# Altium PCB BK5932.PcbDoc (part 2 of 2)
Units mm, origin at the board's own origin, x right, y up, seen from the top; angles counter-clockwise.
Board outline 27.94 x 28.57 mm, 2 copper layers (Top Layer, Bottom Layer); 30 components, 25 nets, 105 pads, 28 vias.
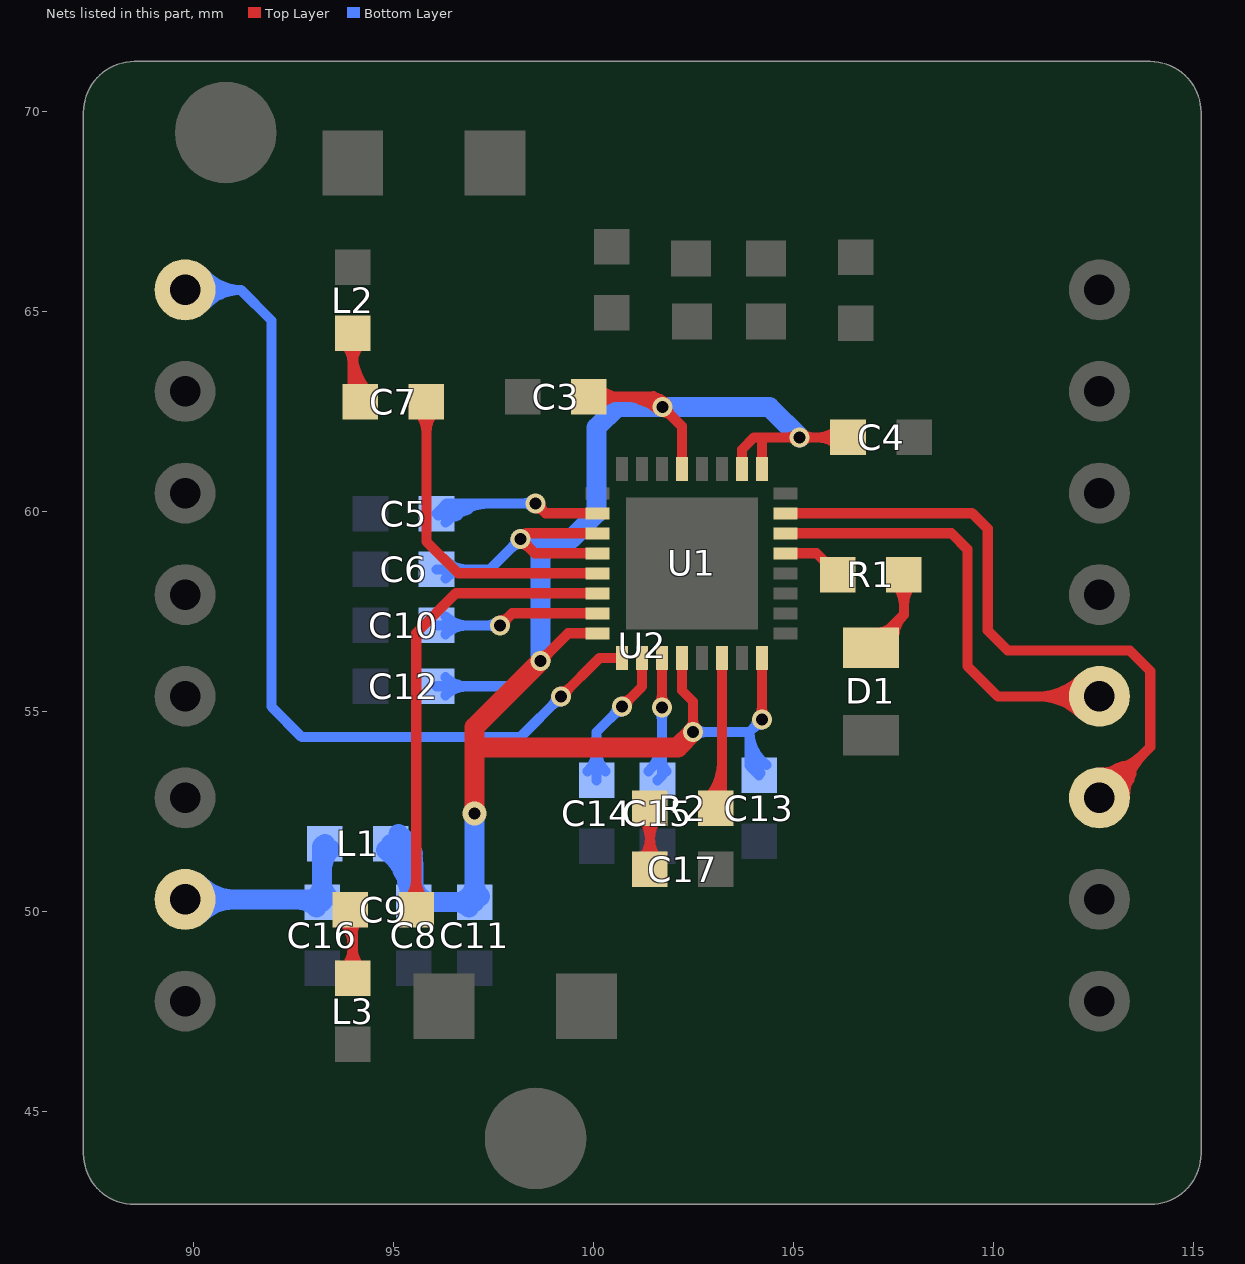
[diagram p2: the nets of this part, all layers, seen from the top]

## Via types
v1: diameter 0.5, hole 0.3, Top Layer to Bottom Layer, 27 vias
v2: diameter 0.6, hole 0.3, Top Layer to Bottom Layer, 1 vias

## Nets (pads, with @x,y where several pads share a name; then routed paths per layer and width w, separated by ;. In a path a pad name is that pad's centre, name@x,y a point inside that pad or via, vN(x,y) a via of type N, cw(c..) or ccw(c..) an arc to the next point about the centre after c; other vN are vias at no path point) (continued)
NetC3_1: C3.1 C4.1 C6.2 C8.2 C11.2 C12.2 C13.2 L1.2 U1.3 U1.4 U1.8 U1.12 U1.16 U1.25 U1.26 U1.29 | length 215.5
  Top Layer w0.254: v1(98.679,56.261) 99.37,56.952 U1.8@100.101,56.952 ; C3.1@99.885,62.865 101.465,62.865 v1(101.727,62.603) 102.203,62.127 ; U1.4@100.101,58.952 98.528,58.952 v1(98.171,59.309) 98.314,59.452 U1.3@100.101,59.452 ; 102.207,62.131 102.211,62.127 U1.29@102.211,61.062 ; U1.12@102.211,56.337 102.211,55.523 102.489,55.245 v1(102.489,54.483) ; U1.26@103.711,61.062 103.711,61.547 104.013,61.849 v1(105.156,61.849) C4.1@106.362,61.849 ; v1(104.211,54.793) U1.16@104.211,56.337 ; U1.25@104.211,61.062 104.211,61.793 ; v1@98.171,59.186 cw(c98.171,58.889) 98.381,59.099 ; v1@98.171,59.186 cw(c98.171,58.889) 98.381,59.099 ; v1@98.171,59.186 cw(c98.171,58.889) 98.381,59.099 ; v1@98.171,59.186 cw(c98.171,58.889) 98.381,59.099 ; v1@98.171,59.186 cw(c98.171,58.889) 98.381,59.099 ; v1@98.171,59.186 cw(c98.171,58.889) 98.381,59.099 ; v1@98.294,59.309 ccw(c98.591,59.309) 98.381,59.099 ; v1@98.294,59.309 ccw(c98.591,59.309) 98.381,59.099 ; v1@98.294,59.309 ccw(c98.591,59.309) 98.381,59.099 ; v1@98.294,59.309 ccw(c98.591,59.309) 98.381,59.099 ; v1@98.294,59.309 ccw(c98.591,59.309) 98.381,59.099 ; v1@98.294,59.309 ccw(c98.591,59.309) 98.381,59.099 ; v1@98.679,56.384 ccw(c98.679,56.681) 98.889,56.471 ; v1@98.679,56.384 ccw(c98.679,56.681) 98.889,56.471 ; v1@98.679,56.384 ccw(c98.679,56.681) 98.889,56.471 ; v1@98.679,56.384 ccw(c98.679,56.681) 98.889,56.471 ; v1@98.679,56.384 ccw(c98.679,56.681) 98.889,56.471 ; v1@98.679,56.384 ccw(c98.679,56.681) 98.889,56.471 ; v1@98.802,56.261 cw(c99.099,56.261) 98.889,56.471 ; v1@98.802,56.261 cw(c99.099,56.261) 98.889,56.471 ; v1@98.802,56.261 cw(c99.099,56.261) 98.889,56.471 ; v1@98.802,56.261 cw(c99.099,56.261) 98.889,56.471 ; v1@98.802,56.261 cw(c99.099,56.261) 98.889,56.471 ; v1@98.802,56.261 cw(c99.099,56.261) 98.889,56.471 ; C3.1@100.11,62.64 cw(c100.652,62.098) 100.652,62.865 ; C3.1@100.11,62.64 cw(c100.652,62.098) 100.652,62.865 ; C3.1@100.11,62.64 cw(c100.652,62.098) 100.652,62.865 ; C3.1@100.11,62.64 cw(c100.652,62.098) 100.652,62.865 ; C3.1@100.11,62.64 cw(c100.652,62.098) 100.652,62.865 ; C3.1@100.11,62.64 cw(c100.652,62.098) 100.652,62.865 ; C3.1@100.11,63.09 ccw(c100.652,63.632) 100.652,62.865 ; C3.1@100.11,63.09 ccw(c100.652,63.632) 100.652,62.865 ; C3.1@100.11,63.09 ccw(c100.652,63.632) 100.652,62.865 ; C3.1@100.11,63.09 ccw(c100.652,63.632) 100.652,62.865 ; C3.1@100.11,63.09 ccw(c100.652,63.632) 100.652,62.865 ; C3.1@100.11,63.09 ccw(c100.652,63.632) 100.652,62.865 ; 100.798,62.865 cw(c100.798,61.674) v1@101.64,62.516 ; 100.798,62.865 cw(c100.798,61.674) v1@101.64,62.516 ; 100.798,62.865 cw(c100.798,61.674) v1@101.64,62.516 ; 100.798,62.865 cw(c100.798,61.674) v1@101.64,62.516 ; 100.798,62.865 cw(c100.798,61.674) v1@101.64,62.516 ; 100.798,62.865 cw(c100.798,61.674) v1@101.64,62.516 ; 101.165,62.79 ccw(c101.512,63.391) v1@101.695,62.722 ; 101.165,62.79 ccw(c101.512,63.391) v1@101.695,62.722 ; 101.165,62.79 ccw(c101.512,63.391) v1@101.695,62.722 ; 101.165,62.79 ccw(c101.512,63.391) v1@101.695,62.722 ; 101.165,62.79 ccw(c101.512,63.391) v1@101.695,62.722 ; 101.165,62.79 ccw(c101.512,63.391) v1@101.695,62.722 ; 101.165,62.79 ccw(c101.512,63.391) v1@101.695,62.722 ; 101.165,62.79 ccw(c101.512,63.391) v1@101.695,62.722 ; 101.165,62.79 ccw(c101.512,63.391) v1@101.695,62.722 ; 101.165,62.79 ccw(c101.512,63.391) v1@101.695,62.722 ; 101.165,62.79 ccw(c101.512,63.391) v1@101.695,62.722 ; 101.165,62.79 ccw(c101.512,63.391) v1@101.695,62.722 ; 101.165,62.79 ccw(c101.512,63.391) v1@101.695,62.722 ; 101.165,62.79 ccw(c101.512,63.391) v1@101.695,62.722 ; 101.165,62.79 ccw(c101.512,63.391) v1@101.695,62.722 ; 101.411,62.865 cw(c101.411,62.287) v1@101.82,62.696 ; 101.411,62.865 cw(c101.411,62.287) v1@101.82,62.696 ; 101.411,62.865 cw(c101.411,62.287) v1@101.82,62.696 ; 101.411,62.865 cw(c101.411,62.287) v1@101.82,62.696 ; 101.411,62.865 cw(c101.411,62.287) v1@101.82,62.696 ; 101.411,62.865 cw(c101.411,62.287) v1@101.82,62.696 ; 101.497,62.882 cw(c101.381,62.681) v1@101.607,62.63 ; 101.497,62.882 cw(c101.381,62.681) v1@101.607,62.63 ; 101.497,62.882 cw(c101.381,62.681) v1@101.607,62.63 ; 101.497,62.882 cw(c101.381,62.681) v1@101.607,62.63 ; 101.497,62.882 cw(c101.381,62.681) v1@101.607,62.63 ; 101.497,62.882 cw(c101.381,62.681) v1@101.607,62.63 ; 101.497,62.882 cw(c101.381,62.681) v1@101.607,62.63 ; 101.497,62.882 cw(c101.381,62.681) v1@101.607,62.63 ; 101.497,62.882 cw(c101.381,62.681) v1@101.607,62.63 ; 101.497,62.882 cw(c101.381,62.681) v1@101.607,62.63 ; 101.497,62.882 cw(c101.381,62.681) v1@101.607,62.63 ; 101.497,62.882 cw(c101.381,62.681) v1@101.607,62.63 ; 101.497,62.882 cw(c101.381,62.681) v1@101.607,62.63 ; 101.497,62.882 cw(c101.381,62.681) v1@101.607,62.63 ; 101.497,62.882 cw(c101.381,62.681) v1@101.607,62.63 ; 101.517,62.813 ccw(c101.727,63.023) v1@101.727,62.726 ; 101.517,62.813 cw(c101.307,62.603) v1@101.604,62.603 ; 101.517,62.813 ccw(c101.727,63.023) v1@101.727,62.726 ; 101.517,62.813 cw(c101.307,62.603) v1@101.604,62.603 ; 101.517,62.813 ccw(c101.727,63.023) v1@101.727,62.726 ; 101.517,62.813 cw(c101.307,62.603) v1@101.604,62.603 ; 101.517,62.813 ccw(c101.727,63.023) v1@101.727,62.726 ; 101.517,62.813 cw(c101.307,62.603) v1@101.604,62.603 ; 101.517,62.813 ccw(c101.727,63.023) v1@101.727,62.726 ; 101.517,62.813 cw(c101.307,62.603) v1@101.604,62.603 ; 101.517,62.813 ccw(c101.727,63.023) v1@101.727,62.726 ; 101.517,62.813 cw(c101.307,62.603) v1@101.604,62.603 ; v1@101.727,62.48 cw(c101.727,62.183) 101.937,62.393 ; v1@101.727,62.48 cw(c101.727,62.183) 101.937,62.393 ; v1@101.727,62.48 cw(c101.727,62.183) 101.937,62.393 ; v1@101.727,62.48 cw(c101.727,62.183) 101.937,62.393 ; v1@101.727,62.48 cw(c101.727,62.183) 101.937,62.393 ; v1@101.727,62.48 cw(c101.727,62.183) 101.937,62.393 ; v1@101.85,62.603 ccw(c102.147,62.603) 101.937,62.393 ; v1@101.85,62.603 ccw(c102.147,62.603) 101.937,62.393 ; v1@101.85,62.603 ccw(c102.147,62.603) 101.937,62.393 ; v1@101.85,62.603 ccw(c102.147,62.603) 101.937,62.393 ; v1@101.85,62.603 ccw(c102.147,62.603) 101.937,62.393 ; v1@101.85,62.603 ccw(c102.147,62.603) 101.937,62.393 ; v1@102.402,54.57 ccw(c102.192,54.78) 102.489,54.78 ; v1@102.402,54.57 ccw(c102.192,54.78) 102.489,54.78 ; v1@102.402,54.57 ccw(c102.192,54.78) 102.489,54.78 ; v1@102.402,54.57 ccw(c102.192,54.78) 102.489,54.78 ; v1@102.402,54.57 ccw(c102.192,54.78) 102.489,54.78 ; v1@102.402,54.57 ccw(c102.192,54.78) 102.489,54.78 ; 102.489,54.78 ccw(c102.786,54.78) v1@102.576,54.57 ; 102.489,54.78 ccw(c102.786,54.78) v1@102.576,54.57 ; 102.489,54.78 ccw(c102.786,54.78) v1@102.576,54.57 ; 102.489,54.78 ccw(c102.786,54.78) v1@102.576,54.57 ; 102.489,54.78 ccw(c102.786,54.78) v1@102.576,54.57 ; 102.489,54.78 ccw(c102.786,54.78) v1@102.576,54.57 ; v1@104.124,54.88 ccw(c103.914,55.09) 104.211,55.09 ; v1@104.124,54.88 ccw(c103.914,55.09) 104.211,55.09 ; v1@104.124,54.88 ccw(c103.914,55.09) 104.211,55.09 ; v1@104.124,54.88 ccw(c103.914,55.09) 104.211,55.09 ; v1@104.124,54.88 ccw(c103.914,55.09) 104.211,55.09 ; v1@104.124,54.88 ccw(c103.914,55.09) 104.211,55.09 ; 104.211,55.09 ccw(c104.508,55.09) v1@104.298,54.88 ; 104.211,55.09 ccw(c104.508,55.09) v1@104.298,54.88 ; 104.211,55.09 ccw(c104.508,55.09) v1@104.298,54.88 ; 104.211,55.09 ccw(c104.508,55.09) v1@104.298,54.88 ; 104.211,55.09 ccw(c104.508,55.09) v1@104.298,54.88 ; 104.211,55.09 ccw(c104.508,55.09) v1@104.298,54.88 ; 104.859,61.849 ccw(c104.859,62.146) v1@105.069,61.936 ; 104.859,61.849 cw(c104.859,61.552) v1@105.069,61.762 ; 104.859,61.849 ccw(c104.859,62.146) v1@105.069,61.936 ; 104.859,61.849 cw(c104.859,61.552) v1@105.069,61.762 ; 104.859,61.849 ccw(c104.859,62.146) v1@105.069,61.936 ; 104.859,61.849 cw(c104.859,61.552) v1@105.069,61.762 ; 104.859,61.849 ccw(c104.859,62.146) v1@105.069,61.936 ; 104.859,61.849 cw(c104.859,61.552) v1@105.069,61.762 ; 104.859,61.849 ccw(c104.859,62.146) v1@105.069,61.936 ; 104.859,61.849 cw(c104.859,61.552) v1@105.069,61.762 ; 104.859,61.849 ccw(c104.859,62.146) v1@105.069,61.936 ; 104.859,61.849 cw(c104.859,61.552) v1@105.069,61.762 ; v1@105.243,61.762 cw(c105.453,61.552) 105.453,61.849 ; v1@105.243,61.762 cw(c105.453,61.552) 105.453,61.849 ; v1@105.243,61.762 cw(c105.453,61.552) 105.453,61.849 ; v1@105.243,61.762 cw(c105.453,61.552) 105.453,61.849 ; v1@105.243,61.762 cw(c105.453,61.552) 105.453,61.849 ; v1@105.243,61.762 cw(c105.453,61.552) 105.453,61.849 ; v1@105.243,61.936 ccw(c105.453,62.146) 105.453,61.849 ; v1@105.243,61.936 ccw(c105.453,62.146) 105.453,61.849 ; v1@105.243,61.936 ccw(c105.453,62.146) 105.453,61.849 ; v1@105.243,61.936 ccw(c105.453,62.146) 105.453,61.849 ; v1@105.243,61.936 ccw(c105.453,62.146) 105.453,61.849 ; v1@105.243,61.936 ccw(c105.453,62.146) 105.453,61.849 ; 105.596,61.849 ccw(c105.596,62.616) C4.1@106.138,62.074 ; 105.596,61.849 cw(c105.596,61.082) C4.1@106.138,61.624 ; 105.596,61.849 ccw(c105.596,62.616) C4.1@106.138,62.074 ; 105.596,61.849 cw(c105.596,61.082) C4.1@106.138,61.624 ; 105.596,61.849 ccw(c105.596,62.616) C4.1@106.138,62.074 ; 105.596,61.849 cw(c105.596,61.082) C4.1@106.138,61.624 ; 105.596,61.849 ccw(c105.596,62.616) C4.1@106.138,62.074 ; 105.596,61.849 cw(c105.596,61.082) C4.1@106.138,61.624 ; 105.596,61.849 ccw(c105.596,62.616) C4.1@106.138,62.074 ; 105.596,61.849 cw(c105.596,61.082) C4.1@106.138,61.624 ; 105.596,61.849 ccw(c105.596,62.616) C4.1@106.138,62.074 ; 105.596,61.849 cw(c105.596,61.082) C4.1@106.138,61.624
  Top Layer w0.5: v2(97.028,52.451) 97.028,54.102 ; v1(98.679,56.261) 97.028,54.61 97.028,54.102 ; v1(102.489,54.483) 102.108,54.102 97.028,54.102
  Bottom Layer w0.254: C12.2@96.075,55.626 98.044,55.626 v1(98.679,56.261) ; C6.2@96.075,58.547 97.409,58.547 v1(98.171,59.309) ; v1(102.489,54.483) 103.901,54.483 ; C13.2@104.14,53.404 103.901,53.642 103.901,54.483 ; v1(104.211,54.793) 103.901,54.483 ; C12.2@96.3,55.401 cw(c96.842,54.859) 96.842,55.626 ; C12.2@96.3,55.401 cw(c96.842,54.859) 96.842,55.626 ; C12.2@96.3,55.401 cw(c96.842,54.859) 96.842,55.626 ; C12.2@96.3,55.401 cw(c96.842,54.859) 96.842,55.626 ; C12.2@96.3,55.401 cw(c96.842,54.859) 96.842,55.626 ; C12.2@96.3,55.401 cw(c96.842,54.859) 96.842,55.626 ; C12.2@96.3,55.851 ccw(c96.842,56.393) 96.842,55.626 ; C12.2@96.3,55.851 ccw(c96.842,56.393) 96.842,55.626 ; C12.2@96.3,55.851 ccw(c96.842,56.393) 96.842,55.626 ; C12.2@96.3,55.851 ccw(c96.842,56.393) 96.842,55.626 ; C12.2@96.3,55.851 ccw(c96.842,56.393) 96.842,55.626 ; C12.2@96.3,55.851 ccw(c96.842,56.393) 96.842,55.626 ; C6.2@96.3,58.322 cw(c96.842,57.78) 96.842,58.547 ; C6.2@96.3,58.322 cw(c96.842,57.78) 96.842,58.547 ; C6.2@96.3,58.322 cw(c96.842,57.78) 96.842,58.547 ; C6.2@96.3,58.322 cw(c96.842,57.78) 96.842,58.547 ; C6.2@96.3,58.322 cw(c96.842,57.78) 96.842,58.547 ; C6.2@96.3,58.322 cw(c96.842,57.78) 96.842,58.547 ; C6.2@96.3,58.772 ccw(c96.842,59.314) 96.842,58.547 ; C6.2@96.3,58.772 ccw(c96.842,59.314) 96.842,58.547 ; C6.2@96.3,58.772 ccw(c96.842,59.314) 96.842,58.547 ; C6.2@96.3,58.772 ccw(c96.842,59.314) 96.842,58.547 ; C6.2@96.3,58.772 ccw(c96.842,59.314) 96.842,58.547 ; C6.2@96.3,58.772 ccw(c96.842,59.314) 96.842,58.547 ; 97.961,59.099 ccw(c97.751,59.309) v1@98.048,59.309 ; 97.961,59.099 cw(c98.171,58.889) v1@98.171,59.186 ; 97.961,59.099 ccw(c97.751,59.309) v1@98.048,59.309 ; 97.961,59.099 cw(c98.171,58.889) v1@98.171,59.186 ; 97.961,59.099 ccw(c97.751,59.309) v1@98.048,59.309 ; 97.961,59.099 cw(c98.171,58.889) v1@98.171,59.186 ; 97.961,59.099 ccw(c97.751,59.309) v1@98.048,59.309 ; 97.961,59.099 cw(c98.171,58.889) v1@98.171,59.186 ; 97.961,59.099 ccw(c97.751,59.309) v1@98.048,59.309 ; 97.961,59.099 cw(c98.171,58.889) v1@98.171,59.186 ; 97.961,59.099 ccw(c97.751,59.309) v1@98.048,59.309 ; 97.961,59.099 cw(c98.171,58.889) v1@98.171,59.186 ; 98.469,56.051 ccw(c98.259,56.261) v1@98.556,56.261 ; 98.469,56.051 cw(c98.679,55.841) v1@98.679,56.138 ; 98.469,56.051 ccw(c98.259,56.261) v1@98.556,56.261 ; 98.469,56.051 cw(c98.679,55.841) v1@98.679,56.138 ; 98.469,56.051 ccw(c98.259,56.261) v1@98.556,56.261 ; 98.469,56.051 cw(c98.679,55.841) v1@98.679,56.138 ; 98.469,56.051 ccw(c98.259,56.261) v1@98.556,56.261 ; 98.469,56.051 cw(c98.679,55.841) v1@98.679,56.138 ; 98.469,56.051 ccw(c98.259,56.261) v1@98.556,56.261 ; 98.469,56.051 cw(c98.679,55.841) v1@98.679,56.138 ; 98.469,56.051 ccw(c98.259,56.261) v1@98.556,56.261 ; 98.469,56.051 cw(c98.679,55.841) v1@98.679,56.138 ; v1@102.576,54.396 cw(c102.786,54.186) 102.786,54.483 ; v1@102.576,54.396 cw(c102.786,54.186) 102.786,54.483 ; v1@102.576,54.396 cw(c102.786,54.186) 102.786,54.483 ; v1@102.576,54.396 cw(c102.786,54.186) 102.786,54.483 ; v1@102.576,54.396 cw(c102.786,54.186) 102.786,54.483 ; v1@102.576,54.396 cw(c102.786,54.186) 102.786,54.483 ; v1@102.576,54.57 ccw(c102.786,54.78) 102.786,54.483 ; v1@102.576,54.57 ccw(c102.786,54.78) 102.786,54.483 ; v1@102.576,54.57 ccw(c102.786,54.78) 102.786,54.483 ; v1@102.576,54.57 ccw(c102.786,54.78) 102.786,54.483 ; v1@102.576,54.57 ccw(c102.786,54.78) 102.786,54.483 ; v1@102.576,54.57 ccw(c102.786,54.78) 102.786,54.483 ; 103.901,53.99 ccw(c104.558,53.99) C13.2@104.177,53.455 ; 103.901,53.99 ccw(c104.558,53.99) C13.2@104.177,53.455 ; 103.901,53.99 ccw(c104.558,53.99) C13.2@104.177,53.455 ; 103.901,53.99 ccw(c104.558,53.99) C13.2@104.177,53.455 ; 103.901,53.99 ccw(c104.558,53.99) C13.2@104.177,53.455 ; 103.901,53.99 ccw(c104.558,53.99) C13.2@104.177,53.455 ; 103.901,54.483 ccw(c104.909,54.483) C13.2@104.324,53.662 ; 103.901,54.483 ccw(c104.909,54.483) C13.2@104.324,53.662 ; 103.901,54.483 ccw(c104.909,54.483) C13.2@104.324,53.662 ; 103.901,54.483 ccw(c104.909,54.483) C13.2@104.324,53.662 ; 103.901,54.483 ccw(c104.909,54.483) C13.2@104.324,53.662 ; 103.901,54.483 ccw(c104.909,54.483) C13.2@104.324,53.662 ; 104.001,54.583 ccw(c103.791,54.793) v1@104.088,54.793 ; 104.001,54.583 cw(c104.211,54.373) v1@104.211,54.67 ; 104.001,54.583 ccw(c103.791,54.793) v1@104.088,54.793 ; 104.001,54.583 cw(c104.211,54.373) v1@104.211,54.67 ; 104.001,54.583 ccw(c103.791,54.793) v1@104.088,54.793 ; 104.001,54.583 cw(c104.211,54.373) v1@104.211,54.67 ; 104.001,54.583 ccw(c103.791,54.793) v1@104.088,54.793 ; 104.001,54.583 cw(c104.211,54.373) v1@104.211,54.67 ; 104.001,54.583 ccw(c103.791,54.793) v1@104.088,54.793 ; 104.001,54.583 cw(c104.211,54.373) v1@104.211,54.67 ; 104.001,54.583 ccw(c103.791,54.793) v1@104.088,54.793 ; 104.001,54.583 cw(c104.211,54.373) v1@104.211,54.67
  Bottom Layer w0.5: L1.2@94.932,51.689 95.504,51.117 C8.2@95.504,50.228 C11.2@97.028,50.228 v2(97.028,52.451) ; v1(98.171,59.309) 98.679,59.309 ; v1(98.679,56.261) 98.679,59.309 ; v1(105.156,61.849) 104.402,62.603 v1(101.727,62.603) 100.584,62.603 100.076,62.095 100.076,59.944 99.441,59.309 98.679,59.309 ; L1.2@94.813,51.536 cw(c93.71,50.121) C8.2@95.504,50.121 ; L1.2@94.813,51.536 cw(c93.71,50.121) C8.2@95.504,50.121 ; L1.2@94.813,51.536 cw(c93.71,50.121) C8.2@95.504,50.121 ; L1.2@94.813,51.536 cw(c93.71,50.121) C8.2@95.504,50.121 ; L1.2@94.813,51.536 cw(c93.71,50.121) C8.2@95.504,50.121 ; L1.2@94.813,51.536 cw(c93.71,50.121) C8.2@95.504,50.121 ; L1.2@94.922,51.495 cw(c94.889,50.881) 95.504,50.881 ; L1.2@94.922,51.495 cw(c94.889,50.881) 95.504,50.881 ; L1.2@94.922,51.495 cw(c94.889,50.881) 95.504,50.881 ; L1.2@94.922,51.495 cw(c94.889,50.881) 95.504,50.881 ; L1.2@94.922,51.495 cw(c94.889,50.881) 95.504,50.881 ; L1.2@94.922,51.495 cw(c94.889,50.881) 95.504,50.881 ; L1.2@94.932,51.494 cw(c94.932,51.025) L1.2@95.265,51.357 ; L1.2@94.932,51.494 cw(c94.932,51.025) L1.2@95.265,51.357 ; L1.2@94.932,51.494 cw(c94.932,51.025) L1.2@95.265,51.357 ; L1.2@94.932,51.494 cw(c94.932,51.025) L1.2@95.265,51.357 ; L1.2@94.932,51.494 cw(c94.932,51.025) L1.2@95.265,51.357 ; L1.2@94.932,51.494 cw(c94.932,51.025) L1.2@95.265,51.357 ; L1.2@95.04,51.527 cw(c95.221,51.255) 95.482,51.452 ; L1.2@95.04,51.527 cw(c95.221,51.255) 95.482,51.452 ; L1.2@95.04,51.527 cw(c95.221,51.255) 95.482,51.452 ; L1.2@95.04,51.527 cw(c95.221,51.255) 95.482,51.452 ; L1.2@95.04,51.527 cw(c95.221,51.255) 95.482,51.452 ; L1.2@95.04,51.527 cw(c95.221,51.255) 95.482,51.452 ; L1.2@95.04,51.527 cw(c95.221,51.255) 95.482,51.452 ; L1.2@95.04,51.527 cw(c95.221,51.255) 95.482,51.452 ; L1.2@95.04,51.527 cw(c95.221,51.255) 95.482,51.452 ; L1.2@95.04,51.527 cw(c95.221,51.255) 95.482,51.452 ; L1.2@95.04,51.527 cw(c95.221,51.255) 95.482,51.452 ; L1.2@95.04,51.527 cw(c95.221,51.255) 95.482,51.452 ; L1.2@95.04,51.527 cw(c95.221,51.255) 95.482,51.452 ; L1.2@95.04,51.527 cw(c95.221,51.255) 95.482,51.452 ; L1.2@95.12,51.93 cw(c94.508,51.144) 95.504,51.144 ; L1.2@95.12,51.93 cw(c94.508,51.144) 95.504,51.144 ; L1.2@95.12,51.93 cw(c94.508,51.144) 95.504,51.144 ; L1.2@95.12,51.93 cw(c94.508,51.144) 95.504,51.144 ; L1.2@95.12,51.93 cw(c94.508,51.144) 95.504,51.144 ; L1.2@95.12,51.93 cw(c94.508,51.144) 95.504,51.144 ; L1.2@95.125,51.662 ccw(c96.226,51.509) 95.339,50.839 ; L1.2@95.125,51.662 ccw(c96.226,51.509) 95.339,50.839 ; L1.2@95.125,51.662 ccw(c96.226,51.509) 95.339,50.839 ; L1.2@95.125,51.662 ccw(c96.226,51.509) 95.339,50.839 ; L1.2@95.125,51.662 ccw(c96.226,51.509) 95.339,50.839 ; L1.2@95.125,51.662 ccw(c96.226,51.509) 95.339,50.839 ; L1.2@95.125,51.662 ccw(c96.226,51.509) 95.339,50.839 ; L1.2@95.125,51.662 ccw(c96.226,51.509) 95.339,50.839 ; L1.2@95.125,51.662 ccw(c96.226,51.509) 95.339,50.839 ; L1.2@95.125,51.662 ccw(c96.226,51.509) 95.339,50.839 ; L1.2@95.125,51.662 ccw(c96.226,51.509) 95.339,50.839 ; L1.2@95.125,51.662 ccw(c96.226,51.509) 95.339,50.839 ; L1.2@95.125,51.662 ccw(c96.226,51.509) 95.339,50.839 ; L1.2@95.125,51.662 ccw(c96.226,51.509) 95.339,50.839 ; L1.2@95.127,51.689 ccw(c95.597,51.689) L1.2@95.265,51.357 ; L1.2@95.127,51.689 ccw(c95.597,51.689) L1.2@95.265,51.357 ; L1.2@95.127,51.689 ccw(c95.597,51.689) L1.2@95.265,51.357 ; L1.2@95.127,51.689 ccw(c95.597,51.689) L1.2@95.265,51.357 ; L1.2@95.127,51.689 ccw(c95.597,51.689) L1.2@95.265,51.357 ; L1.2@95.127,51.689 ccw(c95.597,51.689) L1.2@95.265,51.357 ; 95.338,50.74 ccw(c95.884,50.886) C8.2@95.601,50.397 ; 95.338,50.74 ccw(c95.884,50.886) C8.2@95.601,50.397 ; 95.338,50.74 ccw(c95.884,50.886) C8.2@95.601,50.397 ; 95.338,50.74 ccw(c95.884,50.886) C8.2@95.601,50.397 ; 95.338,50.74 ccw(c95.884,50.886) C8.2@95.601,50.397 ; 95.338,50.74 ccw(c95.884,50.886) C8.2@95.601,50.397 ; 95.338,50.74 ccw(c95.884,50.886) C8.2@95.601,50.397 ; 95.338,50.74 ccw(c95.884,50.886) C8.2@95.601,50.397 ; 95.338,50.74 ccw(c95.884,50.886) C8.2@95.601,50.397 ; 95.338,50.74 ccw(c95.884,50.886) C8.2@95.601,50.397 ; 95.338,50.74 ccw(c95.884,50.886) C8.2@95.601,50.397 ; 95.338,50.74 ccw(c95.884,50.886) C8.2@95.601,50.397 ; 95.338,50.74 ccw(c95.884,50.886) C8.2@95.601,50.397 ; 95.338,50.74 ccw(c95.884,50.886) C8.2@95.601,50.397 ; 95.338,50.74 ccw(c95.884,50.886) C8.2@95.601,50.397 ; C8.2@95.366,50.366 ccw(c95.034,50.698) 95.504,50.698 ; C8.2@95.366,50.366 ccw(c95.034,50.698) 95.504,50.698 ; C8.2@95.366,50.366 ccw(c95.034,50.698) 95.504,50.698 ; C8.2@95.366,50.366 ccw(c95.034,50.698) 95.504,50.698 ; C8.2@95.366,50.366 ccw(c95.034,50.698) 95.504,50.698 ; C8.2@95.366,50.366 ccw(c95.034,50.698) 95.504,50.698 ; 95.504,50.698 ccw(c95.974,50.698) C8.2@95.642,50.366 ; 95.504,50.698 ccw(c95.974,50.698) C8.2@95.642,50.366 ; 95.504,50.698 ccw(c95.974,50.698) C8.2@95.642,50.366 ; 95.504,50.698 ccw(c95.974,50.698) C8.2@95.642,50.366 ; 95.504,50.698 ccw(c95.974,50.698) C8.2@95.642,50.366 ; 95.504,50.698 ccw(c95.974,50.698) C8.2@95.642,50.366 ; C8.2@95.642,50.091 cw(c95.974,49.759) 95.974,50.228 ; C8.2@95.642,50.091 cw(c95.974,49.759) 95.974,50.228 ; C8.2@95.642,50.091 cw(c95.974,49.759) 95.974,50.228 ; C8.2@95.642,50.091 cw(c95.974,49.759) 95.974,50.228 ; C8.2@95.642,50.091 cw(c95.974,49.759) 95.974,50.228 ; C8.2@95.642,50.091 cw(c95.974,49.759) 95.974,50.228 ; C8.2@95.642,50.366 ccw(c95.974,50.698) 95.974,50.228 ; C8.2@95.642,50.366 ccw(c95.974,50.698) 95.974,50.228 ; C8.2@95.642,50.366 ccw(c95.974,50.698) 95.974,50.228 ; C8.2@95.642,50.366 ccw(c95.974,50.698) 95.974,50.228 ; C8.2@95.642,50.366 ccw(c95.974,50.698) 95.974,50.228 ; C8.2@95.642,50.366 ccw(c95.974,50.698) 95.974,50.228 ; 96.558,50.228 ccw(c96.558,50.698) C11.2@96.89,50.366 ; 96.558,50.228 cw(c96.558,49.759) C11.2@96.89,50.091 ; 96.558,50.228 ccw(c96.558,50.698) C11.2@96.89,50.366 ; 96.558,50.228 cw(c96.558,49.759) C11.2@96.89,50.091 ; 96.558,50.228 ccw(c96.558,50.698) C11.2@96.89,50.366 ; 96.558,50.228 cw(c96.558,49.759) C11.2@96.89,50.091 ; 96.558,50.228 ccw(c96.558,50.698) C11.2@96.89,50.366 ; 96.558,50.228 cw(c96.558,49.759) C11.2@96.89,50.091 ; 96.558,50.228 ccw(c96.558,50.698) C11.2@96.89,50.366 ; 96.558,50.228 cw(c96.558,49.759) C11.2@96.89,50.091 ; 96.558,50.228 ccw(c96.558,50.698) C11.2@96.89,50.366 ; 96.558,50.228 cw(c96.558,49.759) C11.2@96.89,50.091 ; C11.2@96.89,50.366 ccw(c96.558,50.698) 97.028,50.698 ; C11.2@96.89,50.366 ccw(c96.558,50.698) 97.028,50.698 ; C11.2@96.89,50.366 ccw(c96.558,50.698) 97.028,50.698 ; C11.2@96.89,50.366 ccw(c96.558,50.698) 97.028,50.698 ; C11.2@96.89,50.366 ccw(c96.558,50.698) 97.028,50.698 ; C11.2@96.89,50.366 ccw(c96.558,50.698) 97.028,50.698 ; 97.028,50.698 ccw(c97.498,50.698) C11.2@97.166,50.366 ; 97.028,50.698 ccw(c97.498,50.698) C11.2@97.166,50.366 ; 97.028,50.698 ccw(c97.498,50.698) C11.2@97.166,50.366 ; 97.028,50.698 ccw(c97.498,50.698) C11.2@97.166,50.366 ; 97.028,50.698 ccw(c97.498,50.698) C11.2@97.166,50.366 ; 97.028,50.698 ccw(c97.498,50.698) C11.2@97.166,50.366
NetC5_2: C5.2 U1.2 | length 25.3
  Top Layer w0.254: v1@98.552,60.075 cw(c98.552,59.778) 98.762,59.988 cw(c98.972,60.198) v1@98.675,60.198 ; v1(98.552,60.198) 98.798,59.952 U1.2@100.101,59.952
  Bottom Layer w0.254: C5.2@96.075,59.944 96.329,60.198 v1(98.552,60.198) ; C5.2@96.12,59.899 cw(c96.842,59.177) 96.842,60.198 ; C5.2@96.12,59.899 cw(c96.842,59.177) 96.842,60.198 ; C5.2@96.12,59.899 cw(c96.842,59.177) 96.842,60.198 ; C5.2@96.12,59.899 cw(c96.842,59.177) 96.842,60.198 ; C5.2@96.124,59.985 ccw(c96.42,60.238) 96.614,59.901 ; C5.2@96.124,59.985 ccw(c96.42,60.238) 96.614,59.901 ; C5.2@96.124,59.985 ccw(c96.42,60.238) 96.614,59.901 ; C5.2@96.124,59.985 ccw(c96.42,60.238) 96.614,59.901 ; C5.2@96.124,59.985 ccw(c96.42,60.238) 96.614,59.901 ; C5.2@96.124,59.985 ccw(c96.42,60.238) 96.614,59.901 ; C5.2@96.293,60.175 ccw(c96.44,60.331) 96.547,60.146 ; C5.2@96.293,60.175 ccw(c96.44,60.331) 96.547,60.146 ; C5.2@96.293,60.175 ccw(c96.44,60.331) 96.547,60.146 ; C5.2@96.293,60.175 ccw(c96.44,60.331) 96.547,60.146 ; C5.2@96.293,60.175 ccw(c96.44,60.331) 96.547,60.146 ; C5.2@96.293,60.175 ccw(c96.44,60.331) 96.547,60.146 ; C5.2@96.3,59.719 cw(c97.455,58.564) 97.455,60.198 ; C5.2@96.3,59.719 cw(c97.455,58.564) 97.455,60.198 ; C5.2@96.3,59.719 cw(c97.455,58.564) 97.455,60.198 ; C5.2@96.3,59.719 cw(c97.455,58.564) 97.455,60.198 ; C5.2@96.317,60.15 ccw(c96.656,60.44) 96.879,60.054 ; C5.2@96.317,60.15 ccw(c96.656,60.44) 96.879,60.054 ; C5.2@96.317,60.15 ccw(c96.656,60.44) 96.879,60.054 ; C5.2@96.317,60.15 ccw(c96.656,60.44) 96.879,60.054 ; C5.2@96.317,60.15 ccw(c96.656,60.44) 96.879,60.054 ; C5.2@96.317,60.15 ccw(c96.656,60.44) 96.879,60.054 ; C5.2@96.391,59.908 cw(c96.706,59.871) 96.547,60.146 ; C5.2@96.391,59.908 cw(c96.706,59.871) 96.547,60.146 ; C5.2@96.391,59.908 cw(c96.706,59.871) 96.547,60.146 ; C5.2@96.391,59.908 cw(c96.706,59.871) 96.547,60.146 ; C5.2@96.391,59.908 cw(c96.706,59.871) 96.547,60.146 ; C5.2@96.391,59.908 cw(c96.706,59.871) 96.547,60.146 ; 98.255,60.198 ccw(c98.255,60.495) v1@98.465,60.285 ; 98.255,60.198 cw(c98.255,59.901) v1@98.465,60.111 ; 98.255,60.198 ccw(c98.255,60.495) v1@98.465,60.285 ; 98.255,60.198 cw(c98.255,59.901) v1@98.465,60.111 ; 98.255,60.198 ccw(c98.255,60.495) v1@98.465,60.285 ; 98.255,60.198 cw(c98.255,59.901) v1@98.465,60.111 ; 98.255,60.198 ccw(c98.255,60.495) v1@98.465,60.285 ; 98.255,60.198 cw(c98.255,59.901) v1@98.465,60.111
NetC7_1: C7.1 L2.1 | length 4.7
  Top Layer w0.254: L2.1@93.755,64.228 cw(c93.213,63.686) 93.98,63.686 cw(c94.747,63.686) L2.1@94.205,64.228 ; 93.98,63.351 ccw(c94.784,63.351) C7.1@94.215,62.783 ; 93.98,63.964 ccw(c95.397,63.964) C7.1@94.395,62.963 ; L2.1@93.98,64.453 93.98,62.928 C7.1@94.17,62.738
NetC7_2: C7.2 U1.5 | length 15.3
  Top Layer w0.254: C7.2@95.822,62.738 95.822,59.245 96.615,58.452 U1.5@100.101,58.452 ; C7.2@95.597,62.513 cw(c95.055,61.971) 95.822,61.971 ; C7.2@95.597,62.513 cw(c95.055,61.971) 95.822,61.971 ; C7.2@95.597,62.513 cw(c95.055,61.971) 95.822,61.971 ; C7.2@95.597,62.513 cw(c95.055,61.971) 95.822,61.971 ; C7.2@95.597,62.513 cw(c95.055,61.971) 95.822,61.971 ; C7.2@95.597,62.513 cw(c95.055,61.971) 95.822,61.971 ; 95.822,61.971 cw(c96.588,61.971) C7.2@96.046,62.513 ; 95.822,61.971 cw(c96.588,61.971) C7.2@96.046,62.513 ; 95.822,61.971 cw(c96.588,61.971) C7.2@96.046,62.513 ; 95.822,61.971 cw(c96.588,61.971) C7.2@96.046,62.513 ; 95.822,61.971 cw(c96.588,61.971) C7.2@96.046,62.513 ; 95.822,61.971 cw(c96.588,61.971) C7.2@96.046,62.513
NetC9_1: C9.1 L3.2 | length 6.6
  Top Layer w0.254: L3.2@93.755,48.548 ccw(c93.213,49.09) 93.98,49.09 ccw(c94.747,49.09) L3.2@94.205,48.548 ; C9.1@93.916,50.038 93.98,49.974 L3.2@93.98,48.323 ; C9.1@93.692,49.813 cw(c92.997,49.118) 93.98,49.118 ; C9.1@93.692,49.813 cw(c92.997,49.118) 93.98,49.118 ; C9.1@93.692,49.813 cw(c92.997,49.118) 93.98,49.118 ; 93.98,49.425 cw(c94.53,49.425) C9.1@94.141,49.813 ; 93.98,49.425 cw(c94.53,49.425) C9.1@94.141,49.813 ; 93.98,49.425 cw(c94.53,49.425) C9.1@94.141,49.813
NetC9_2: C9.2 U1.6 | length 19.1
  Top Layer w0.254: C9.2@95.567,50.038 95.567,56.959 96.56,57.952 U1.6@100.101,57.952 ; C9.2@95.343,50.263 ccw(c94.801,50.805) 95.567,50.805 ; C9.2@95.343,50.263 ccw(c94.801,50.805) 95.567,50.805 ; C9.2@95.343,50.263 ccw(c94.801,50.805) 95.567,50.805 ; C9.2@95.343,50.263 ccw(c94.801,50.805) 95.567,50.805 ; C9.2@95.343,50.263 ccw(c94.801,50.805) 95.567,50.805 ; C9.2@95.343,50.263 ccw(c94.801,50.805) 95.567,50.805 ; 95.567,50.805 ccw(c96.334,50.805) C9.2@95.792,50.263 ; 95.567,50.805 ccw(c96.334,50.805) C9.2@95.792,50.263 ; 95.567,50.805 ccw(c96.334,50.805) C9.2@95.792,50.263 ; 95.567,50.805 ccw(c96.334,50.805) C9.2@95.792,50.263 ; 95.567,50.805 ccw(c96.334,50.805) C9.2@95.792,50.263 ; 95.567,50.805 ccw(c96.334,50.805) C9.2@95.792,50.263
NetC10_2: C10.2 U1.7 | length 15.6
  Top Layer w0.254: v1(97.663,57.15) 97.965,57.452 U1.7@100.101,57.452 ; v1@97.663,57.273 ccw(c97.663,57.57) 97.873,57.36 ; v1@97.663,57.273 ccw(c97.663,57.57) 97.873,57.36 ; v1@97.663,57.273 ccw(c97.663,57.57) 97.873,57.36 ; v1@97.786,57.15 cw(c98.083,57.15) 97.873,57.36 ; v1@97.786,57.15 cw(c98.083,57.15) 97.873,57.36 ; v1@97.786,57.15 cw(c98.083,57.15) 97.873,57.36
  Bottom Layer w0.254: C10.2@96.075,57.15 v1(97.663,57.15) ; C10.2@96.3,56.925 cw(c96.842,56.383) 96.842,57.15 ; C10.2@96.3,56.925 cw(c96.842,56.383) 96.842,57.15 ; C10.2@96.3,56.925 cw(c96.842,56.383) 96.842,57.15 ; C10.2@96.3,56.925 cw(c96.842,56.383) 96.842,57.15 ; C10.2@96.3,56.925 cw(c96.842,56.383) 96.842,57.15 ; C10.2@96.3,56.925 cw(c96.842,56.383) 96.842,57.15 ; C10.2@96.3,57.375 ccw(c96.842,57.917) 96.842,57.15 ; C10.2@96.3,57.375 ccw(c96.842,57.917) 96.842,57.15 ; C10.2@96.3,57.375 ccw(c96.842,57.917) 96.842,57.15 ; C10.2@96.3,57.375 ccw(c96.842,57.917) 96.842,57.15 ; C10.2@96.3,57.375 ccw(c96.842,57.917) 96.842,57.15 ; C10.2@96.3,57.375 ccw(c96.842,57.917) 96.842,57.15 ; 97.366,57.15 ccw(c97.366,57.447) v1@97.576,57.237 ; 97.366,57.15 cw(c97.366,56.853) v1@97.576,57.063 ; 97.366,57.15 ccw(c97.366,57.447) v1@97.576,57.237 ; 97.366,57.15 cw(c97.366,56.853) v1@97.576,57.063 ; 97.366,57.15 ccw(c97.366,57.447) v1@97.576,57.237 ; 97.366,57.15 cw(c97.366,56.853) v1@97.576,57.063 ; 97.366,57.15 ccw(c97.366,57.447) v1@97.576,57.237 ; 97.366,57.15 cw(c97.366,56.853) v1@97.576,57.063 ; 97.366,57.15 ccw(c97.366,57.447) v1@97.576,57.237 ; 97.366,57.15 cw(c97.366,56.853) v1@97.576,57.063 ; 97.366,57.15 ccw(c97.366,57.447) v1@97.576,57.237 ; 97.366,57.15 cw(c97.366,56.853) v1@97.576,57.063
NetC14_2: C14.2 U1.10 | length 16.4
  Top Layer w0.254: v1(100.711,55.118) 101.211,55.618 U1.10@101.211,56.337 ; v1@100.711,55.241 ccw(c100.711,55.538) 100.921,55.328 ; v1@100.711,55.241 ccw(c100.711,55.538) 100.921,55.328 ; v1@100.711,55.241 ccw(c100.711,55.538) 100.921,55.328 ; v1@100.711,55.241 ccw(c100.711,55.538) 100.921,55.328 ; v1@100.711,55.241 ccw(c100.711,55.538) 100.921,55.328 ; v1@100.711,55.241 ccw(c100.711,55.538) 100.921,55.328 ; v1@100.834,55.118 cw(c101.131,55.118) 100.921,55.328 ; v1@100.834,55.118 cw(c101.131,55.118) 100.921,55.328 ; v1@100.834,55.118 cw(c101.131,55.118) 100.921,55.328 ; v1@100.834,55.118 cw(c101.131,55.118) 100.921,55.328 ; v1@100.834,55.118 cw(c101.131,55.118) 100.921,55.328 ; v1@100.834,55.118 cw(c101.131,55.118) 100.921,55.328
  Bottom Layer w0.254: C14.2@100.076,53.276 100.076,54.483 v1(100.711,55.118) ; C14.2@99.851,53.501 ccw(c99.309,54.043) 100.076,54.043 ; C14.2@99.851,53.501 ccw(c99.309,54.043) 100.076,54.043 ; C14.2@99.851,53.501 ccw(c99.309,54.043) 100.076,54.043 ; C14.2@99.851,53.501 ccw(c99.309,54.043) 100.076,54.043 ; C14.2@99.851,53.501 ccw(c99.309,54.043) 100.076,54.043 ; C14.2@99.851,53.501 ccw(c99.309,54.043) 100.076,54.043 ; 100.076,54.043 ccw(c100.843,54.043) C14.2@100.301,53.501 ; 100.076,54.043 ccw(c100.843,54.043) C14.2@100.301,53.501 ; 100.076,54.043 ccw(c100.843,54.043) C14.2@100.301,53.501 ; 100.076,54.043 ccw(c100.843,54.043) C14.2@100.301,53.501 ; 100.076,54.043 ccw(c100.843,54.043) C14.2@100.301,53.501 ; 100.076,54.043 ccw(c100.843,54.043) C14.2@100.301,53.501 ; 100.501,54.908 ccw(c100.291,55.118) v1@100.588,55.118 ; 100.501,54.908 cw(c100.711,54.698) v1@100.711,54.995 ; 100.501,54.908 ccw(c100.291,55.118) v1@100.588,55.118 ; 100.501,54.908 cw(c100.711,54.698) v1@100.711,54.995 ; 100.501,54.908 ccw(c100.291,55.118) v1@100.588,55.118 ; 100.501,54.908 cw(c100.711,54.698) v1@100.711,54.995 ; 100.501,54.908 ccw(c100.291,55.118) v1@100.588,55.118 ; 100.501,54.908 cw(c100.711,54.698) v1@100.711,54.995 ; 100.501,54.908 ccw(c100.291,55.118) v1@100.588,55.118 ; 100.501,54.908 cw(c100.711,54.698) v1@100.711,54.995 ; 100.501,54.908 ccw(c100.291,55.118) v1@100.588,55.118 ; 100.501,54.908 cw(c100.711,54.698) v1@100.711,54.995
NetC15_2: C15.2 U1.11 | length 14.5
  Top Layer w0.254: v1(101.711,55.102) U1.11@101.711,56.337 ; v1@101.624,55.189 ccw(c101.414,55.399) 101.711,55.399 ; v1@101.624,55.189 ccw(c101.414,55.399) 101.711,55.399 ; v1@101.624,55.189 ccw(c101.414,55.399) 101.711,55.399 ; 101.711,55.399 ccw(c102.008,55.399) v1@101.798,55.189 ; 101.711,55.399 ccw(c102.008,55.399) v1@101.798,55.189 ; 101.711,55.399 ccw(c102.008,55.399) v1@101.798,55.189
  Bottom Layer w0.254: C15.2@101.6,53.276 101.711,53.388 v1(101.711,55.102) ; C15.2@101.375,53.501 ccw(c100.566,54.311) 101.711,54.311 ; C15.2@101.375,53.501 ccw(c100.566,54.311) 101.711,54.311 ; C15.2@101.375,53.501 ccw(c100.566,54.311) 101.711,54.311 ; C15.2@101.375,53.501 ccw(c100.566,54.311) 101.711,54.311 ; C15.2@101.375,53.501 ccw(c100.566,54.311) 101.711,54.311 ; C15.2@101.375,53.501 ccw(c100.566,54.311) 101.711,54.311 ; v1@101.624,55.015 cw(c101.414,54.805) 101.711,54.805 ; v1@101.624,55.015 cw(c101.414,54.805) 101.711,54.805 ; v1@101.624,55.015 cw(c101.414,54.805) 101.711,54.805 ; v1@101.624,55.015 cw(c101.414,54.805) 101.711,54.805 ; v1@101.624,55.015 cw(c101.414,54.805) 101.711,54.805 ; v1@101.624,55.015 cw(c101.414,54.805) 101.711,54.805 ; 101.711,53.775 ccw(c102.099,53.775) C15.2@101.825,53.501 ; 101.711,53.775 ccw(c102.099,53.775) C15.2@101.825,53.501 ; 101.711,53.775 ccw(c102.099,53.775) C15.2@101.825,53.501 ; 101.711,53.775 ccw(c102.099,53.775) C15.2@101.825,53.501 ; 101.711,53.775 ccw(c102.099,53.775) C15.2@101.825,53.501 ; 101.711,53.775 ccw(c102.099,53.775) C15.2@101.825,53.501 ; 101.711,54.805 cw(c102.008,54.805) v1@101.798,55.015 ; 101.711,54.805 cw(c102.008,54.805) v1@101.798,55.015 ; 101.711,54.805 cw(c102.008,54.805) v1@101.798,55.015 ; 101.711,54.805 cw(c102.008,54.805) v1@101.798,55.015 ; 101.711,54.805 cw(c102.008,54.805) v1@101.798,55.015 ; 101.711,54.805 cw(c102.008,54.805) v1@101.798,55.015
NetC17_2: C17.2 R2.1 | length 16
  Top Layer w0.254: C17.2@101.409,51.054 R2.1@101.409,52.578 ; C17.2@101.185,51.279 ccw(c100.643,51.821) 101.409,51.821 ; C17.2@101.185,51.279 ccw(c100.643,51.821) 101.409,51.821 ; C17.2@101.185,51.279 ccw(c100.643,51.821) 101.409,51.821 ; C17.2@101.185,51.279 ccw(c100.643,51.821) 101.409,51.821 ; C17.2@101.185,51.279 ccw(c100.643,51.821) 101.409,51.821 ; C17.2@101.185,51.279 ccw(c100.643,51.821) 101.409,51.821 ; R2.1@101.185,52.353 cw(c100.643,51.811) 101.409,51.811 ; R2.1@101.185,52.353 cw(c100.643,51.811) 101.409,51.811 ; R2.1@101.185,52.353 cw(c100.643,51.811) 101.409,51.811 ; R2.1@101.185,52.353 cw(c100.643,51.811) 101.409,51.811 ; R2.1@101.185,52.353 cw(c100.643,51.811) 101.409,51.811 ; R2.1@101.185,52.353 cw(c100.643,51.811) 101.409,51.811 ; 101.409,51.811 cw(c102.176,51.811) R2.1@101.634,52.353 ; 101.409,51.811 cw(c102.176,51.811) R2.1@101.634,52.353 ; 101.409,51.811 cw(c102.176,51.811) R2.1@101.634,52.353 ; 101.409,51.811 cw(c102.176,51.811) R2.1@101.634,52.353 ; 101.409,51.811 cw(c102.176,51.811) R2.1@101.634,52.353 ; 101.409,51.811 cw(c102.176,51.811) R2.1@101.634,52.353 ; 101.409,51.821 ccw(c102.176,51.821) C17.2@101.634,51.279 ; 101.409,51.821 ccw(c102.176,51.821) C17.2@101.634,51.279 ; 101.409,51.821 ccw(c102.176,51.821) C17.2@101.634,51.279 ; 101.409,51.821 ccw(c102.176,51.821) C17.2@101.634,51.279 ; 101.409,51.821 ccw(c102.176,51.821) C17.2@101.634,51.279 ; 101.409,51.821 ccw(c102.176,51.821) C17.2@101.634,51.279
NetD1_1: D1.1 R1.1 | length 30.8
  Top Layer w0.254: D1.1@106.934,56.591 107.759,57.417 ; R1.1@107.759,58.42 107.759,57.417 ; D1.1@107.124,56.972 ccw(c107.124,57.432) 107.45,57.107 ; D1.1@107.124,56.972 ccw(c107.124,57.432) 107.45,57.107 ; D1.1@107.124,56.972 ccw(c107.124,57.432) 107.45,57.107 ; D1.1@107.124,56.972 ccw(c107.124,57.432) 107.45,57.107 ; D1.1@107.124,56.972 ccw(c107.124,57.432) 107.45,57.107 ; D1.1@107.124,56.972 ccw(c107.124,57.432) 107.45,57.107 ; D1.1@107.203,56.491 ccw(c106.617,57.239) 107.56,57.124 ; D1.1@107.203,56.491 ccw(c106.617,57.239) 107.56,57.124 ; D1.1@107.203,56.491 ccw(c106.617,57.239) 107.56,57.124 ; D1.1@107.203,56.491 ccw(c106.617,57.239) 107.56,57.124 ; D1.1@107.203,56.491 ccw(c106.617,57.239) 107.56,57.124 ; D1.1@107.203,56.491 ccw(c106.617,57.239) 107.56,57.124 ; D1.1@107.203,56.491 ccw(c106.617,57.239) 107.56,57.124 ; D1.1@107.203,56.491 ccw(c106.617,57.239) 107.56,57.124 ; D1.1@107.203,56.491 ccw(c106.617,57.239) 107.56,57.124 ; D1.1@107.203,56.491 ccw(c106.617,57.239) 107.56,57.124 ; D1.1@107.203,56.491 ccw(c106.617,57.239) 107.56,57.124 ; D1.1@107.203,56.491 ccw(c106.617,57.239) 107.56,57.124 ; D1.1@107.203,56.491 ccw(c106.617,57.239) 107.56,57.124 ; D1.1@107.203,56.491 ccw(c106.617,57.239) 107.56,57.124 ; D1.1@107.203,56.491 ccw(c106.617,57.239) 107.56,57.124 ; D1.1@107.25,56.609 cw(c107.774,56.683) D1.1@107.4,57.057 ; D1.1@107.25,56.609 cw(c107.774,56.683) D1.1@107.4,57.057 ; D1.1@107.25,56.609 cw(c107.774,56.683) D1.1@107.4,57.057 ; D1.1@107.25,56.609 cw(c107.774,56.683) D1.1@107.4,57.057 ; D1.1@107.25,56.609 cw(c107.774,56.683) D1.1@107.4,57.057 ; D1.1@107.25,56.609 cw(c107.774,56.683) D1.1@107.4,57.057 ; D1.1@107.502,56.645 cw(c108.403,56.773) 107.759,57.417 ; D1.1@107.502,56.645 cw(c108.403,56.773) 107.759,57.417 ; D1.1@107.502,56.645 cw(c108.403,56.773) 107.759,57.417 ; D1.1@107.502,56.645 cw(c108.403,56.773) 107.759,57.417 ; D1.1@107.502,56.645 cw(c108.403,56.773) 107.759,57.417 ; D1.1@107.502,56.645 cw(c108.403,56.773) 107.759,57.417 ; R1.1@107.535,58.195 cw(c106.993,57.653) 107.759,57.653 ; R1.1@107.535,58.195 cw(c106.993,57.653) 107.759,57.653 ; R1.1@107.535,58.195 cw(c106.993,57.653) 107.759,57.653 ; R1.1@107.535,58.195 cw(c106.993,57.653) 107.759,57.653 ; R1.1@107.535,58.195 cw(c106.993,57.653) 107.759,57.653 ; R1.1@107.535,58.195 cw(c106.993,57.653) 107.759,57.653 ; 107.759,57.653 cw(c108.526,57.653) R1.1@107.984,58.195 ; 107.759,57.653 cw(c108.526,57.653) R1.1@107.984,58.195 ; 107.759,57.653 cw(c108.526,57.653) R1.1@107.984,58.195 ; 107.759,57.653 cw(c108.526,57.653) R1.1@107.984,58.195 ; 107.759,57.653 cw(c108.526,57.653) R1.1@107.984,58.195 ; 107.759,57.653 cw(c108.526,57.653) R1.1@107.984,58.195
NetR1_2: R1.2 U1.21 | length 1.5
  Top Layer w0.254: U1.21@104.8,58.952 105.576,58.952 R1.2@106.108,58.42
NetR2_2: R2.2 U1.14 | length 13
  Top Layer w0.254: R2.2@103.06,52.578 103.211,52.729 U1.14@103.211,56.337 ; R2.2@102.836,52.803 ccw(c101.931,53.708) 103.211,53.708 ; R2.2@102.836,52.803 ccw(c101.931,53.708) 103.211,53.708 ; R2.2@102.836,52.803 ccw(c101.931,53.708) 103.211,53.708 ; R2.2@102.836,52.803 ccw(c101.931,53.708) 103.211,53.708 ; R2.2@102.836,52.803 ccw(c101.931,53.708) 103.211,53.708 ; R2.2@102.836,52.803 ccw(c101.931,53.708) 103.211,53.708 ; R2.2@103.016,52.623 ccw(c102.544,53.095) 103.211,53.095 ; R2.2@103.016,52.623 ccw(c102.544,53.095) 103.211,53.095 ; R2.2@103.016,52.623 ccw(c102.544,53.095) 103.211,53.095 ; R2.2@103.016,52.623 ccw(c102.544,53.095) 103.211,53.095 ; R2.2@103.016,52.623 ccw(c102.544,53.095) 103.211,53.095 ; R2.2@103.016,52.623 ccw(c102.544,53.095) 103.211,53.095
RF_CE: U1.9 U2.9 | length 47.5
  Top Layer w0.254: v1(99.187,55.372) 100.152,56.337 U1.9@100.711,56.337 ; v1@99.187,55.495 ccw(c99.187,55.792) 99.397,55.582 ; v1@99.187,55.495 ccw(c99.187,55.792) 99.397,55.582 ; v1@99.187,55.495 ccw(c99.187,55.792) 99.397,55.582 ; v1@99.187,55.495 ccw(c99.187,55.792) 99.397,55.582 ; v1@99.187,55.495 ccw(c99.187,55.792) 99.397,55.582 ; v1@99.187,55.495 ccw(c99.187,55.792) 99.397,55.582 ; v1@99.31,55.372 cw(c99.607,55.372) 99.397,55.582 ; v1@99.31,55.372 cw(c99.607,55.372) 99.397,55.582 ; v1@99.31,55.372 cw(c99.607,55.372) 99.397,55.582 ; v1@99.31,55.372 cw(c99.607,55.372) 99.397,55.582 ; v1@99.31,55.372 cw(c99.607,55.372) 99.397,55.582 ; v1@99.31,55.372 cw(c99.607,55.372) 99.397,55.582
  Bottom Layer w0.254: U2.9@89.789,65.537 91.181,65.537 ; v1(99.187,55.372) 98.171,54.356 92.71,54.356 91.948,55.118 91.948,64.77 91.181,65.537 ; U2.9@90.077,65.287 cw(c90.624,64.812) 90.624,65.537 ; U2.9@90.077,65.287 cw(c90.624,64.812) 90.624,65.537 ; U2.9@90.077,65.287 cw(c90.624,64.812) 90.624,65.537 ; U2.9@90.077,65.287 cw(c90.624,64.812) 90.624,65.537 ; U2.9@90.077,65.287 cw(c90.624,64.812) 90.624,65.537 ; U2.9@90.077,65.287 cw(c90.624,64.812) 90.624,65.537 ; U2.9@90.077,65.787 ccw(c90.624,66.262) 90.624,65.537 ; U2.9@90.077,65.787 ccw(c90.624,66.262) 90.624,65.537 ; U2.9@90.077,65.787 ccw(c90.624,66.262) 90.624,65.537 ; U2.9@90.077,65.787 ccw(c90.624,66.262) 90.624,65.537 ; U2.9@90.077,65.787 ccw(c90.624,66.262) 90.624,65.537 ; U2.9@90.077,65.787 ccw(c90.624,66.262) 90.624,65.537 ; U2.9@90.269,65.121 cw(c91.181,64.329) 91.181,65.537 ; U2.9@90.269,65.121 cw(c91.181,64.329) 91.181,65.537 ; U2.9@90.269,65.121 cw(c91.181,64.329) 91.181,65.537 ; U2.9@90.269,65.121 cw(c91.181,64.329) 91.181,65.537 ; U2.9@90.269,65.121 cw(c91.181,64.329) 91.181,65.537 ; U2.9@90.269,65.121 cw(c91.181,64.329) 91.181,65.537 ; U2.9@90.269,65.953 ccw(c91.181,66.745) 91.181,65.537 ; U2.9@90.269,65.953 ccw(c91.181,66.745) 91.181,65.537 ; U2.9@90.269,65.953 ccw(c91.181,66.745) 91.181,65.537 ; U2.9@90.269,65.953 ccw(c91.181,66.745) 91.181,65.537 ; U2.9@90.269,65.953 ccw(c91.181,66.745) 91.181,65.537 ; U2.9@90.269,65.953 ccw(c91.181,66.745) 91.181,65.537 ; 98.977,55.162 ccw(c98.767,55.372) v1@99.064,55.372 ; 98.977,55.162 cw(c99.187,54.952) v1@99.187,55.249 ; 98.977,55.162 ccw(c98.767,55.372) v1@99.064,55.372 ; 98.977,55.162 cw(c99.187,54.952) v1@99.187,55.249 ; 98.977,55.162 ccw(c98.767,55.372) v1@99.064,55.372 ; 98.977,55.162 cw(c99.187,54.952) v1@99.187,55.249 ; 98.977,55.162 ccw(c98.767,55.372) v1@99.064,55.372 ; 98.977,55.162 cw(c99.187,54.952) v1@99.187,55.249 ; 98.977,55.162 ccw(c98.767,55.372) v1@99.064,55.372 ; 98.977,55.162 cw(c99.187,54.952) v1@99.187,55.249 ; 98.977,55.162 ccw(c98.767,55.372) v1@99.064,55.372 ; 98.977,55.162 cw(c99.187,54.952) v1@99.187,55.249
RF_SCK: U1.22 U2.4 | length 34.4
  Top Layer w0.254: U1.22@104.8,59.452 108.95,59.452 109.347,59.055 109.347,56.134 110.109,55.372 112.644,55.372 U2.4@112.649,55.377 ; 111.104,55.372 ccw(c111.104,56.922) U2.4@112.2,55.826 ; 111.104,55.372 ccw(c111.104,56.922) U2.4@112.2,55.826 ; 111.104,55.372 ccw(c111.104,56.922) U2.4@112.2,55.826 ; 111.104,55.372 ccw(c111.104,56.922) U2.4@112.2,55.826 ; 111.104,55.372 ccw(c111.104,56.922) U2.4@112.2,55.826 ; 111.104,55.372 ccw(c111.104,56.922) U2.4@112.2,55.826 ; 111.128,55.372 cw(c111.128,53.856) U2.4@112.2,54.928 ; 111.128,55.372 cw(c111.128,53.856) U2.4@112.2,54.928 ; 111.128,55.372 cw(c111.128,53.856) U2.4@112.2,54.928 ; 111.128,55.372 cw(c111.128,53.856) U2.4@112.2,54.928 ; 111.128,55.372 cw(c111.128,53.856) U2.4@112.2,54.928 ; 111.128,55.372 cw(c111.128,53.856) U2.4@112.2,54.928 ; 111.717,55.372 ccw(c111.717,56.309) U2.4@112.38,55.646 ; 111.717,55.372 ccw(c111.717,56.309) U2.4@112.38,55.646 ; 111.717,55.372 ccw(c111.717,56.309) U2.4@112.38,55.646 ; 111.717,55.372 ccw(c111.717,56.309) U2.4@112.38,55.646 ; 111.717,55.372 ccw(c111.717,56.309) U2.4@112.38,55.646 ; 111.717,55.372 ccw(c111.717,56.309) U2.4@112.38,55.646 ; 111.741,55.372 cw(c111.741,54.469) U2.4@112.38,55.108 ; 111.741,55.372 cw(c111.741,54.469) U2.4@112.38,55.108 ; 111.741,55.372 cw(c111.741,54.469) U2.4@112.38,55.108 ; 111.741,55.372 cw(c111.741,54.469) U2.4@112.38,55.108 ; 111.741,55.372 cw(c111.741,54.469) U2.4@112.38,55.108 ; 111.741,55.372 cw(c111.741,54.469) U2.4@112.38,55.108
RF_SDA: U1.23 U2.3 | length 72.5
  Top Layer w0.254: U1.23@104.8,59.952 109.466,59.952 109.855,59.563 109.855,57.023 110.358,56.52 113.406,56.52 113.919,56.007 113.919,54.107 U2.3@112.649,52.837 ; U2.3@112.525,52.862 cw(c113.511,52.66) 113.251,53.633 ; U2.3@112.525,52.862 cw(c113.511,52.66) 113.251,53.633 ; U2.3@112.525,52.862 cw(c113.511,52.66) 113.251,53.633 ; U2.3@112.525,52.862 cw(c113.511,52.66) 113.251,53.633 ; U2.3@112.525,52.862 cw(c113.511,52.66) 113.251,53.633 ; U2.3@112.525,52.862 cw(c113.511,52.66) 113.251,53.633 ; U2.3@112.525,52.862 cw(c113.511,52.66) 113.251,53.633 ; U2.3@112.525,52.862 cw(c113.511,52.66) 113.251,53.633 ; U2.3@112.525,52.862 cw(c113.511,52.66) 113.251,53.633 ; U2.3@112.525,52.862 cw(c113.511,52.66) 113.251,53.633 ; U2.3@112.525,52.862 cw(c113.511,52.66) 113.251,53.633 ; U2.3@112.525,52.862 cw(c113.511,52.66) 113.251,53.633 ; U2.3@112.525,52.862 cw(c113.511,52.66) 113.251,53.633 ; U2.3@112.525,52.862 cw(c113.511,52.66) 113.251,53.633 ; U2.3@112.525,52.862 cw(c113.511,52.66) 113.251,53.633 ; U2.3@112.649,53.218 ccw(c112.649,54.138) 113.299,53.487 ; U2.3@112.649,53.218 ccw(c112.649,54.138) 113.299,53.487 ; U2.3@112.649,53.218 ccw(c112.649,54.138) 113.299,53.487 ; U2.3@112.649,53.218 ccw(c112.649,54.138) 113.299,53.487 ; U2.3@112.649,53.218 ccw(c112.649,54.138) 113.299,53.487 ; U2.3@112.649,53.218 ccw(c112.649,54.138) 113.299,53.487 ; U2.3@112.649,53.472 ccw(c112.649,55.005) 113.733,53.921 ; U2.3@112.649,53.472 ccw(c112.649,55.005) 113.733,53.921 ; U2.3@112.649,53.472 ccw(c112.649,55.005) 113.733,53.921 ; U2.3@112.649,53.472 ccw(c112.649,55.005) 113.733,53.921 ; U2.3@112.649,53.472 ccw(c112.649,55.005) 113.733,53.921 ; U2.3@112.649,53.472 ccw(c112.649,55.005) 113.733,53.921 ; U2.3@112.674,52.713 ccw(c112.472,53.699) 113.445,53.439 ; U2.3@112.674,52.713 ccw(c112.472,53.699) 113.445,53.439 ; U2.3@112.674,52.713 ccw(c112.472,53.699) 113.445,53.439 ; U2.3@112.674,52.713 ccw(c112.472,53.699) 113.445,53.439 ; U2.3@112.674,52.713 ccw(c112.472,53.699) 113.445,53.439 ; U2.3@112.674,52.713 ccw(c112.472,53.699) 113.445,53.439 ; U2.3@112.674,52.713 ccw(c112.472,53.699) 113.445,53.439 ; U2.3@112.674,52.713 ccw(c112.472,53.699) 113.445,53.439 ; U2.3@112.674,52.713 ccw(c112.472,53.699) 113.445,53.439 ; U2.3@112.674,52.713 ccw(c112.472,53.699) 113.445,53.439 ; U2.3@112.674,52.713 ccw(c112.472,53.699) 113.445,53.439 ; U2.3@112.674,52.713 ccw(c112.472,53.699) 113.445,53.439 ; U2.3@112.674,52.713 ccw(c112.472,53.699) 113.445,53.439 ; U2.3@112.674,52.713 ccw(c112.472,53.699) 113.445,53.439 ; U2.3@112.674,52.713 ccw(c112.472,53.699) 113.445,53.439 ; U2.3@113.03,52.837 cw(c113.95,52.837) 113.299,53.487 ; U2.3@113.03,52.837 cw(c113.95,52.837) 113.299,53.487 ; U2.3@113.03,52.837 cw(c113.95,52.837) 113.299,53.487 ; U2.3@113.03,52.837 cw(c113.95,52.837) 113.299,53.487 ; U2.3@113.03,52.837 cw(c113.95,52.837) 113.299,53.487 ; U2.3@113.03,52.837 cw(c113.95,52.837) 113.299,53.487 ; U2.3@113.284,52.837 cw(c114.817,52.837) 113.733,53.921 ; U2.3@113.284,52.837 cw(c114.817,52.837) 113.733,53.921 ; U2.3@113.284,52.837 cw(c114.817,52.837) 113.733,53.921 ; U2.3@113.284,52.837 cw(c114.817,52.837) 113.733,53.921 ; U2.3@113.284,52.837 cw(c114.817,52.837) 113.733,53.921 ; U2.3@113.284,52.837 cw(c114.817,52.837) 113.733,53.921
VCC3.3: C16.2 L1.1 U2.15 | length 27.6
  Bottom Layer w0.5: U2.15@89.789,50.297 93.149,50.297 C16.2@93.218,50.228 93.218,51.625 L1.1@93.281,51.689 ; U2.15@90.151,49.935 cw(c91.025,49.061) 91.025,50.297 ; U2.15@90.151,49.935 cw(c91.025,49.061) 91.025,50.297 ; U2.15@90.151,49.935 cw(c91.025,49.061) 91.025,50.297 ; U2.15@90.151,49.935 cw(c91.025,49.061) 91.025,50.297 ; U2.15@90.151,49.935 cw(c91.025,49.061) 91.025,50.297 ; U2.15@90.151,49.935 cw(c91.025,49.061) 91.025,50.297 ; U2.15@90.151,50.659 ccw(c91.025,51.533) 91.025,50.297 ; U2.15@90.151,50.659 ccw(c91.025,51.533) 91.025,50.297 ; U2.15@90.151,50.659 ccw(c91.025,51.533) 91.025,50.297 ; U2.15@90.151,50.659 ccw(c91.025,51.533) 91.025,50.297 ; U2.15@90.151,50.659 ccw(c91.025,51.533) 91.025,50.297 ; U2.15@90.151,50.659 ccw(c91.025,51.533) 91.025,50.297 ; 92.583,50.297 cw(c92.583,49.594) C16.2@93.08,50.091 ; 92.583,50.297 cw(c92.583,49.594) C16.2@93.08,50.091 ; 92.583,50.297 cw(c92.583,49.594) C16.2@93.08,50.091 ; 92.583,50.297 cw(c92.583,49.594) C16.2@93.08,50.091 ; 92.583,50.297 cw(c92.583,49.594) C16.2@93.08,50.091 ; 92.583,50.297 cw(c92.583,49.594) C16.2@93.08,50.091 ; C16.2@93.08,50.366 ccw(c92.748,50.698) 93.218,50.698 ; C16.2@93.08,50.366 ccw(c92.748,50.698) 93.218,50.698 ; C16.2@93.08,50.366 ccw(c92.748,50.698) 93.218,50.698 ; C16.2@93.08,50.366 ccw(c92.748,50.698) 93.218,50.698 ; C16.2@93.08,50.366 ccw(c92.748,50.698) 93.218,50.698 ; C16.2@93.08,50.366 ccw(c92.748,50.698) 93.218,50.698 ; 93.218,50.698 ccw(c93.688,50.698) C16.2@93.356,50.366 ; 93.218,50.698 ccw(c93.688,50.698) C16.2@93.356,50.366 ; 93.218,50.698 ccw(c93.688,50.698) C16.2@93.356,50.366 ; 93.218,50.698 ccw(c93.688,50.698) C16.2@93.356,50.366 ; 93.218,50.698 ccw(c93.688,50.698) C16.2@93.356,50.366 ; 93.218,50.698 ccw(c93.688,50.698) C16.2@93.356,50.366 ; 93.218,51.066 cw(c93.904,51.066) L1.1@93.419,51.551 ; 93.218,51.066 cw(c93.904,51.066) L1.1@93.419,51.551 ; 93.218,51.066 cw(c93.904,51.066) L1.1@93.419,51.551 ; 93.218,51.066 cw(c93.904,51.066) L1.1@93.419,51.551 ; 93.218,51.066 cw(c93.904,51.066) L1.1@93.419,51.551 ; 93.218,51.066 cw(c93.904,51.066) L1.1@93.419,51.551
pads on no net: U1.1 U1.13 U1.15 U1.17 U1.18 U1.19 U1.20 U1.24 U1.30 U1.31 U1.32 U2.5 U2.6 U2.10 U2.11 U2.12 U2.13 U2.14

## Polygon pours and split planes (outlines as drawn)
GND on Bottom Layer "Bottom Layer-No Net" (solid, pour order 8): 87.249,53.848 87.249,44.196 87.249,43.553 88.033,42.769 88.13,42.672 92.075,42.672 114.308,42.672 115.092,43.456 115.189,43.553 115.189,45.847 115.189,70.366 114.405,71.15 114.308,71.247 112.776,71.247 88.22,71.247 87.282,70.309 87.249,70.276 87.249,69.469
GND on Top Layer "Bottom Layer-No Net" (solid, pour order 4): 87.249,66.294 87.249,45.212 87.249,44.069 87.249,43.462 87.879,42.833 88.039,42.672 90.805,42.672 113.411,42.672 114.43,42.672 114.927,43.169 115.189,43.431 115.189,45.847 115.189,68.961 114.927,69.223 114.927,70.75 114.805,70.75 114.405,71.15 114.308,71.247 112.395,71.247 88.008,71.247 87.746,70.985 87.249,70.488 87.249,68.961

## Keep-outs
Keep-Out Layer:
  the board outline again, w0.254

## Silkscreen, mask and mechanical layers (free items; w line width, h text height)
Top Overlay:
  lines w0.254: 88.519,64.262 91.059,64.262 ; 90.932,46.101 91.059,46.101 ; 111.379,43.688 113.792,46.101 113.919,46.101 ; 111.379,64.262 113.919,64.262 ; 91.059,46.101 91.059,66.675 88.519,66.675 88.519,46.101 91.059,46.101 ; 113.919,46.101 113.919,66.675 111.379,66.675 111.379,46.101 113.919,46.101
  text "BK9532-v1.0" at 104.013,67.564 h1
  text "AN/CE" at 88.9,67.31 h0.5
  text "AON/PWM" at 107.569,64.77 h0.5
  text "AOP/INT" at 107.823,62.738 h0.5
  text "RST" at 91.44,62.484 h0.5
  text "CS" at 91.44,60.325 h0.5
  text "RX" at 110.109,60.071 h0.5
  text "SCK" at 91.313,57.785 h0.5
  text "TX" at 110.109,57.658 h0.5
  text "MISO" at 91.44,55.118 h0.5
  text "SCK" at 109.728,54.991 h0.5
  text "MOSI" at 91.313,52.705 h0.5
  text "SDA" at 109.728,52.578 h0.5
  text "+5V" at 109.601,49.911 h0.5
  text "+3.3V" at 90.932,49.784 h0.5
  text "GND" at 91.44,47.625 h0.5
  text "GND" at 109.601,47.498 h0.5